# EAGLE board ATtiny85 and DRV8830 Combo -- v01 (EAGLE 6.5.0)
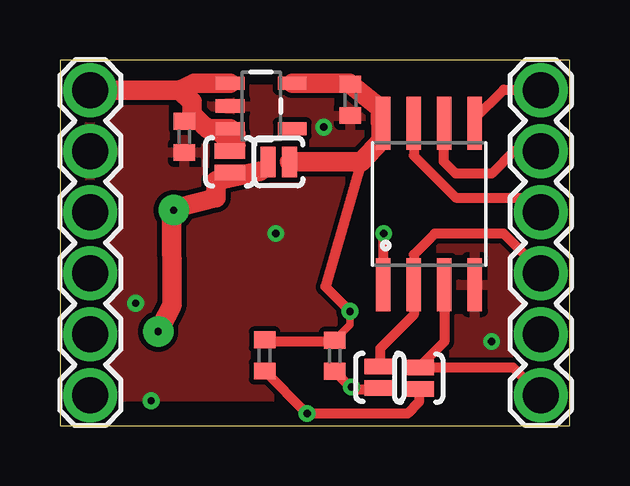
[diagram p0: board, top side]
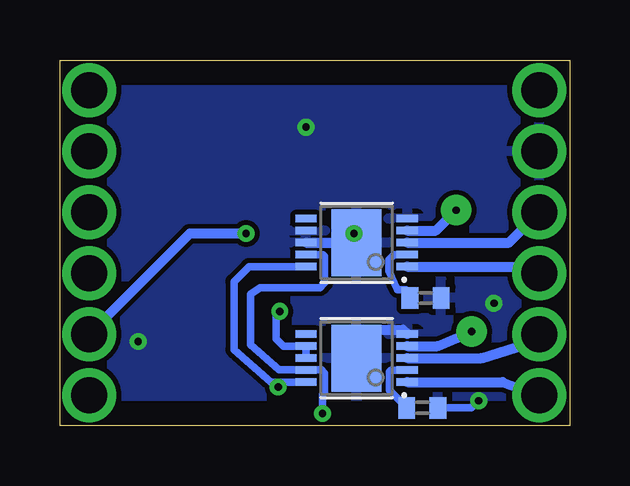
[diagram p1: board, bottom side, seen from below]

Size 21.26 x 15.23 mm. Coordinates in mm from the lower left corner, seen from the top.
Outline: 0,0 21.26,0 21.26,15.23 0,15.23 0,0
Copper layers (1*16): Top 0.035mm / dielectric 1.5mm / Bottom 0.035mm
Design rules "default *": minimum track width 10mil, minimum drill 24mil, track to track 8mil, track to pad 8mil, pad to pad 8mil, via to via 8mil, smd to smd 8mil, copper to edge 40mil, drill to drill 8mil, minimum pad ring 10mil, minimum via ring 8mil, stop-mask expansion 4mil, vias tented up to drill 0.3mm, thermal gap 10mil

## Footprints (pad centres in the part's own frame; a part is rotated, then mirrored left to right if it is on the bottom)
R0402 = smd 0.7 x 0.9: 1 -0.65,0; 2 0.65,0
C0402 = smd 0.7 x 0.9: 1 -0.65,0; 2 0.65,0
SJ_2S-NO = smd 0.635 x 1.27: 1 -0.45,0; 2 0.45,0
SOT23-5 = smd 0.55 x 1.2: 1 -0.95,-1.3; 2 0,-1.3; 3 0.95,-1.3; 4 0.95,1.3; 5 -0.95,1.3
MSOP-10-GNDPAD = smd 0.305 x 0.889: 1 -1,-2.11; 2 -0.5,-2.11; 3 0,-2.11; 4 0.5,-2.11; 5 1,-2.11; 6 1,2.11; 7 0.5,2.11; 8 0,2.11; 9 -0.5,2.11; 10 -1,2.11 | smd 2.794 x 2.083: GND 0,0
1X6_SHORT_ROUND = drill 1.5 pad 2.2: 1 1.27,-1.27; 2 3.81,-1.27; 3 6.35,-1.27; 4 8.89,-1.27; 5 11.43,-1.27; 6 13.97,-1.27
SO08-EIAJ = smd 0.61 x 2.21: 1 -1.905,-3.378; 2 -0.635,-3.378; 3 0.635,-3.378; 4 1.905,-3.378; 5 1.905,3.353; 6 0.635,3.353; 7 -0.635,3.353; 8 -1.905,3.353

## Placement (x,y rotation side)
1K  R3  [R0402]  8.54,2.92 270 top
C1  1uf  [C0402]  5.19,12.03 270 top
C2  1uf  [C0402]  12.11,13.56 270 top
R1  .33  [R0402]  6.02,5.31 180 bottom
R2  1k  [R0402]  11.46,2.91 270 top
R3  .33  [R0402]  6.15,0.74 180 bottom
RAW  SOLDERJUMPERNO  [SJ_2S-NO]  7.08,10.99 270 top
SJ6  SOLDERJUMPERNO  [SJ_2S-NO]  14.96,1.97 90 top
SJ7  SOLDERJUMPERNO  [SJ_2S-NO]  13.34,2.01 90 top
U1  V_REG_LDOSMD  [SOT23-5]  8.39,13.31 270 top
U2  DRV8830  [MSOP-10-GNDPAD]  8.89,2.81 90 bottom
U3  DRV8830  [MSOP-10-GNDPAD]  8.89,7.62 90 bottom
U$1  1X6_SHORT_ROUND  [1X6_SHORT_ROUND]  21.31,15.24 270 top
U$2  ATTINY85  [SO08-EIAJ]  15.39,9.25 0 top
U$4  1X6_SHORT_ROUND  [1X6_SHORT_ROUND]  2.54,15.24 270 top
VREG  SOLDERJUMPERNO  [SJ_2S-NO]  9.13,10.98 180 top

## Library data of the parts
1K C1 C2 R1-R3 = resistor
RAW SJ6 SJ7 U1 U$2 VREG = SparkFun
U2 U3 = SparkFun-PowerIC; PROD_ID: IC-11646
U$1 U$4 = Random parts(01-14-14)

## Nets
GND: C1.2 C2.2 R1.1 R3.1 U1.2 U2.5 U2.GND U3.5 U3.7 U3.8 U3.GND U$2.4 U$4.2
N$1: R1.2 U3.2
N$2: R3.2 U2.2
N$3: U2.3 U$4.5
N$4: U2.1 U$4.6
N$5: U3.1 U$4.4
N$6: U3.3 U$4.3
PB0: U$1.1 U$2.5
PB1: U$1.2 U$2.6
PB2: U$1.3 U$2.7
PB3: SJ7.2 U$1.4 U$2.2
PB4: SJ6.2 U$1.6 U$2.3
PB5: U$1.5 U$2.1
RAW: C1.1 RAW.1 U1.1 U1.3 U$4.1
SCL: R2.2 SJ7.1 U2.10 U3.10
SDA: 1K.2 SJ6.1 U2.9 U3.9
VCC: RAW.2 U2.4 U3.4 VREG.2
VREG: 1K.1 C2.1 R2.1 U1.5 U2.7 U2.8 U$2.8 VREG.1

## Tracks (layer width: path | path; a pad name or v marks a point on that pad's centre or on a via)
GND  (via drill 0.3)
  Bottom 0.305: R3.1 4.09,0.74 v3.8,1.03
  Bottom 0.406: U3.8 U3.GND | U2.GND 8.89,3.61 8.5,4 6.97,4 U2.5
  other vias: 9,8 9,8 18,3.5 11,12.44 3.16,5.09
  pour Bottom: 0,0 0,15.24 21.59,15.24 21.59,0
  pour Top: 0,0 0,15.24 21.59,15.24 21.59,0
N$1
  Bottom 0.305: U3.2 7.33,7.12 7.54,6.92 7.54,6.42 7.18,5.66 6.82,5.66 6.69,5.33 R1.2
N$2
  Bottom 0.305: U2.2 7.45,2.31 7.53,2.23 7.53,1.46 R3.2
N$3
  Bottom 0.406: U2.3 3.69,2.81 1.5,3.5 U$4.5
N$4
  Bottom 0.406: U2.1 2.81,1.81 U$4.6
N$5
  Bottom 0.406: U3.1 1.54,6.62 U$4.4
N$6
  Bottom 0.406: U3.3 2.54,7.62 U$4.3
PB0
  Top 0.406: U$2.5 17.3,12.79 18.5,14 20.01,14 U$1.1
PB1
  Top 0.406: U$1.2 18.93,11.43 18,10.5 16.5,10.5 16,11 16,12.58 U$2.6
PB2
  Top 0.406: U$2.7 14.76,11.24 16.5,9.5 19.43,9.5 U$1.3
PB3
  Top 0.406: U$1.4 20.04,6.46 18.5,8 15.63,8 14.75,7.12 U$2.2 14.76,4.61 13.35,3.21 13.35,2.47 SJ7.2
PB4
  Top 0.406: U$2.3 16.02,3.48 SJ6.2 18.89,2.42 U$1.6
PB5  (via drill 0.3)
  Top 0.406: U$2.1 13.48,7.99 v13.5,8
  Bottom 0.406: v13.5,8 15.85,8 U$1.5
RAW
  Top 0.406: 6,12.5 6.01,12.5 | U1.3 | 5.5,13 5.5,12.99 C1.1 | U1.3 RAW.1 | 6.5,12.5 6.5,12.09 6.98,11.61 7.46,11.61 7.53,11.68 7.53,12.17 7.27,12.43 | 7.27,12.43 7.27,11.73 7.32,11.69 | 7.27,12.43 7.16,12.43 U1.3
  Top 0.813: U$4.1 4.97,13.97 | U1.1 5.6,14.26 4.97,13.97 | 4.97,13.97 5.5,13.5 5.5,13 6,12.5 | 6.01,12.5 6.15,12.36 U1.3
SCL  (via drill 0.3)
  Top 0.305: 12.21,1.5 12.21,1.55 v12.16,1.6
  Top 0.406: SJ7.1 12.78,1.5 12.21,1.5 R2.2
  Bottom 0.305: U3.10 13.38,6.62 14,6 14,3.16 12.45,1.81 12.36,1.81 | 12.36,1.81 10.92,1.81 U2.10 | 12.36,1.81 v12.16,1.6
SDA  (via drill 0.3)
  Top 0.406: SJ6.1 14.96,0.96 14.5,0.5 v10.31,0.5 1K.2
  Bottom 0.305: U3.9 10.29,7.12 10.22,7.05 10.22,5.94 10.41,5.75 12.93,5.75 13.31,5.47 13.3,3.37 12.12,2.32 U2.9 10.99,2.32 10.35,2.32 10.24,2.19 10.24,1.37 10.31,1.3 v10.31,0.5
VCC  (via drill 0.3 pad 1.27)
  Top 0.406: 8.03,10.54 RAW.2 | 8.34,10.6 8.33,10.64 VREG.2
  Top 0.813: 8.34,10.6 8.03,10.54 6.51,10.19 6.5,9.5 4.97,9.1 | 4.97,9.1 4.66,9.01 4.67,5.06 4.63,4.93 v4.1,3.92 | v4.74,8.97 4.85,8.97 4.97,9.1
  Bottom 0.406: U3.4 5.59,8.12 v4.74,8.97 | U2.4 5.51,3.31 v4.1,3.92
VREG  (via drill 0.3)
  Top 0.305: v12.09,4.75 12.09,4.19 R2.1
  Top 0.406: 13.5,12.62 U$2.8 13.39,11.87 | 12.56,10.98 11.06,5.78 v12.09,4.75 | 1K.1 8.5,3.54 8.5,3.5 11.5,3.5 11.46,3.54 R2.1
  Top 0.813: U1.5 12.07,14.26 C2.1 13.37,13.21 13.39,11.87 12.56,10.98 VREG.1
  Bottom 0.305: U2.8 U2.7 11.93,3.31 12.24,3.62 12.24,4.61 v12.09,4.75